# Altium PCB VlakecRemote.PcbDoc
Units mm, origin at the board's own origin, x right, y up, seen from the top; angles counter-clockwise.
Board outline 51.31 x 33.91 mm, 2 copper layers (Top Layer, Bottom Layer); 73 components, 50 nets, 159 pads, 66 vias.
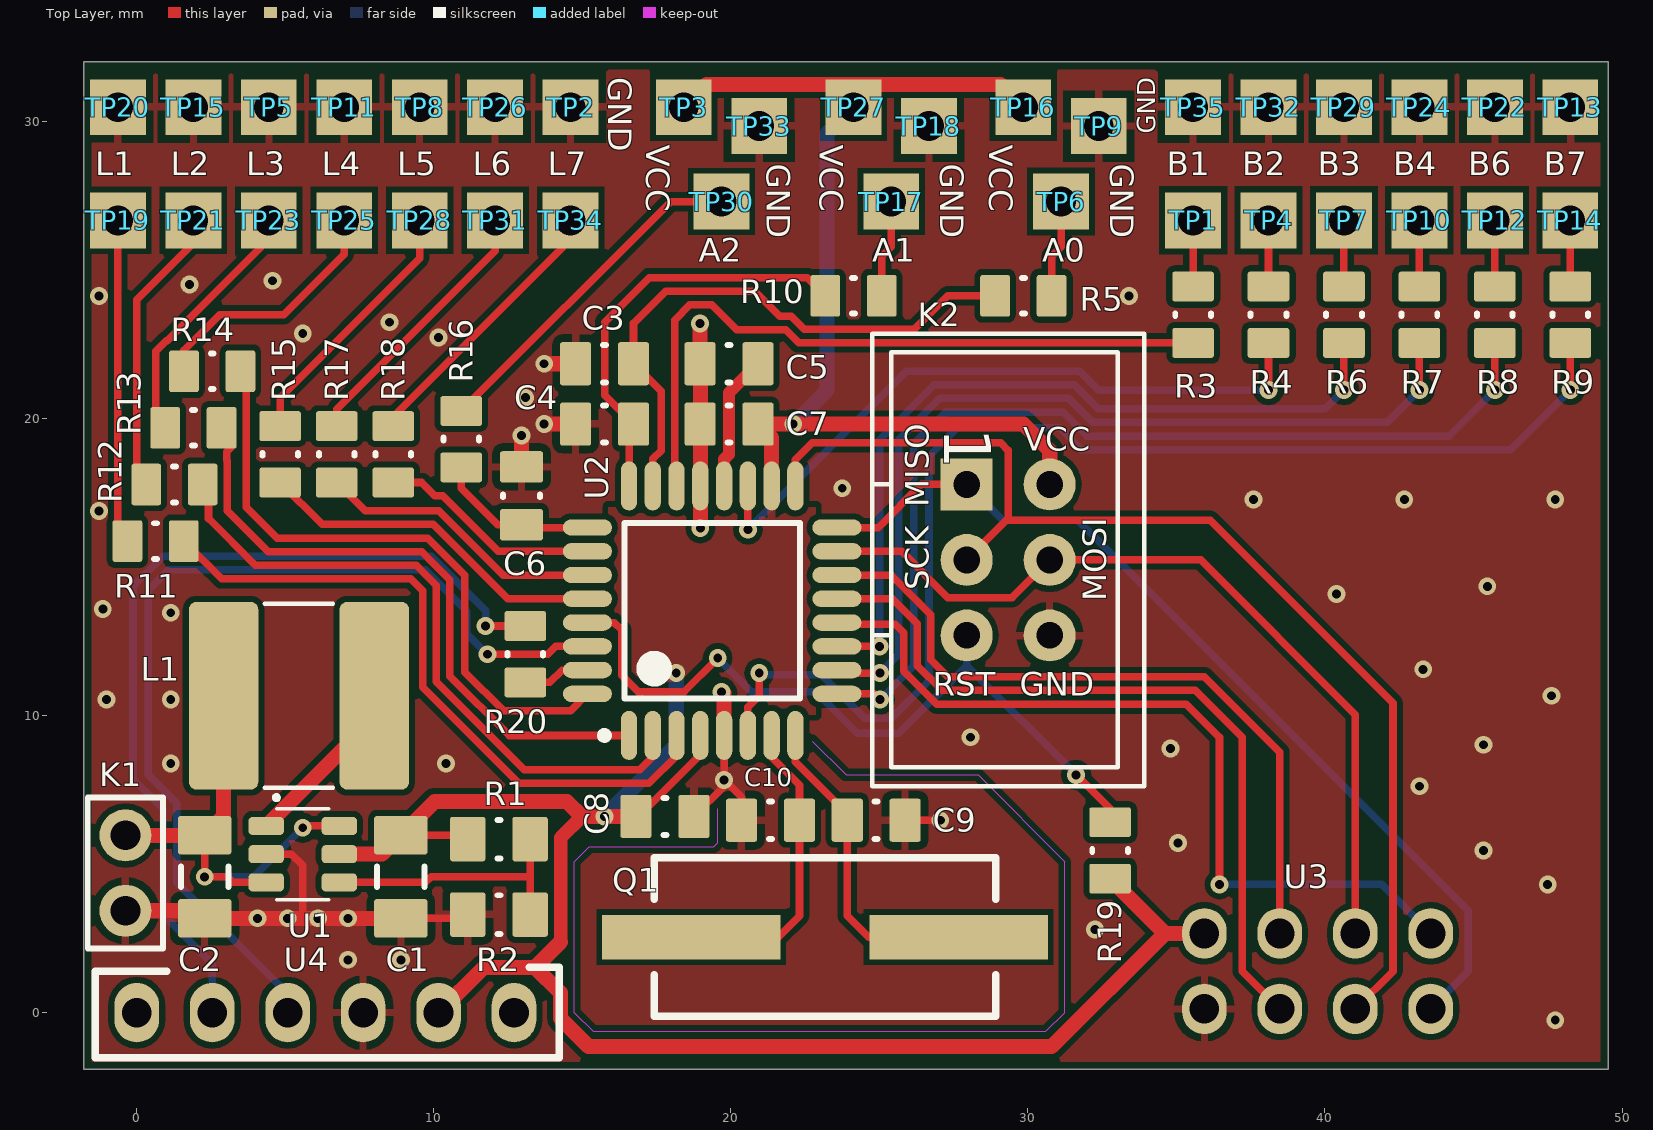
[diagram p0: Top Layer view]
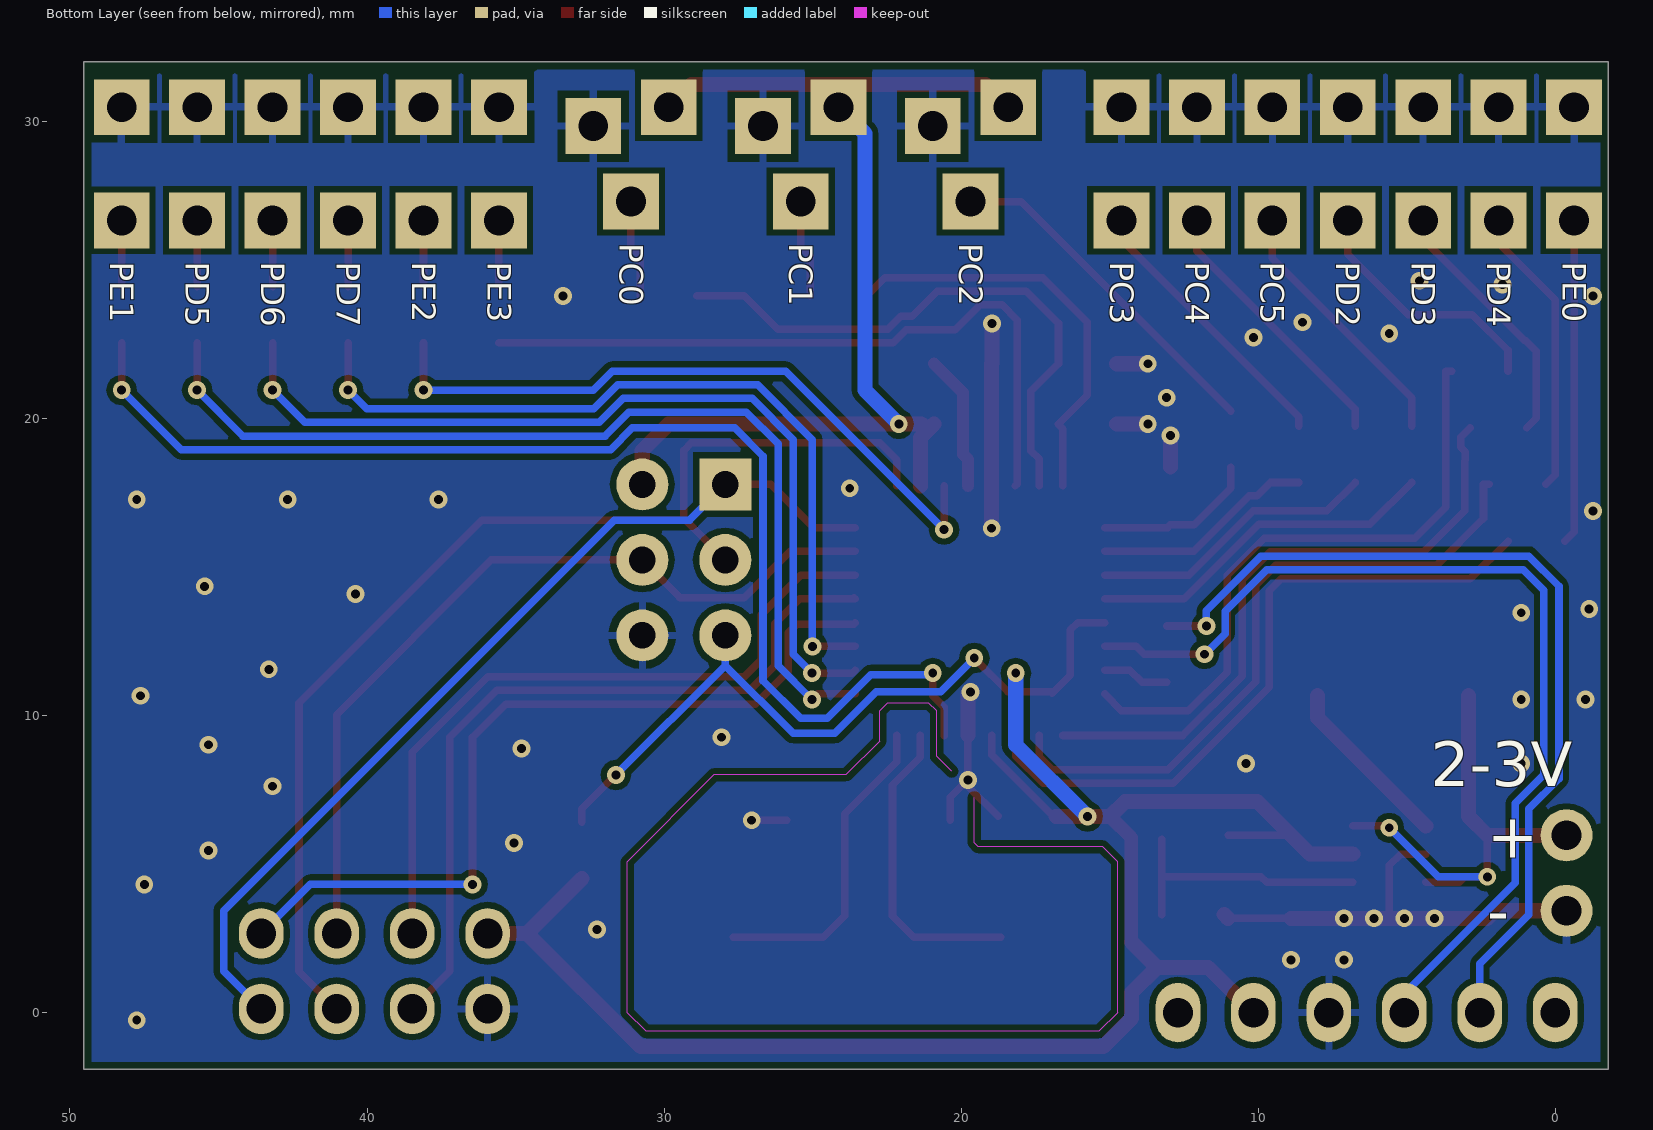
[diagram p1: Bottom Layer view, seen from below]

## Layer stack, top to bottom
Top Solder: solder mask 0.0102, Solder Resist, Dk 3.5
Top Layer: signal copper 0.0356
Dielectric 1: dielectric 0.32, FR-4, Dk 4.8
Bottom Layer: signal copper 0.0356
Bottom Solder: solder mask 0.0102, Solder Resist, Dk 3.5

## Board outline
-1.778,-1.905 -1.778,32.004 49.53,32.004 49.53,-1.905

## Design rules (kind name [scope] priority, off if disabled: settings)
BoardOutlineClearance [All] p1: gap=0.254 ignorepadtopadclearanceinfootprint=FALSE
Clearance [All] p1: gap=0.203 ignorepadtopadclearanceinfootprint=FALSE
HoleSize [All] p1: absolutevalues=TRUE maxlimit=25.4 minlimit=0.025 maxpercent=80.000 minpercent=20.000
HoleToHoleClearance [All] p1: gap=0.152 allowstackedmicrovias=TRUE
MinimumSolderMaskSliver [All] p1: minsoldermaskwidth=0.152
PolygonConnect [All] p1: thpad.connectstyle=Relief thpad.reliefconductorwidth=0.254 thpad.reliefentries=4 thpad.polygonreliefangle="90 Angle" thpad.airgapwidth=0.254 smdpad.connectstyle=Relief smdpad.reliefconductorwidth=0.254 smdpad.reliefentries=4 smdpad.polygonreliefangle="90 Angle" smdpad.airgapwidth=0.254 via.connectstyle=Direct via.reliefconductorwidth=0.254 via.reliefentries=4 via.polygonreliefangle="90 Angle" via.airgapwidth=0.254
RoutingVias [All] p1: holewidth=0.3 width=0.6 viastyle="Through Hole" minholewidth=0.3 minwidth=0.6 maxholewidth=0.711 maxwidth=1.27
SilkToSilkClearance [All] p1: silktosilkclearance=0.152
SilkToSolderMaskClearance [IsPad] p1: minsilkscreentomaskgap=0.152 clearancetoexposedcopper=TRUE
SolderMaskExpansion [All] p1: expansion=0.102
Width [All] p1: maxlimit=0.508 minlimit=0.203 preferedwidth=0.254
25 further rules are at their usual default settings.

## Components (designator, comment, footprint, x,y, rotation, side; value= is the part's Value field where it differs from the comment)
C1 "10u" C1206(3216)_N 8.89,4.572 r270 top
C2 "10u" C1206(3216)_N 2.286,4.572 r270 top
C3 "100n" C0805(2012)_N 15.748,21.844 r180 top
C4 "100n" C0805(2012)_N 15.748,19.812 r180 top
C5 "100n" C0805(2012)_N 19.939,21.844 r180 top
C6 "100n" C0805(2012)_N 12.954,17.399 r90 top
C7 "100n" C0805(2012)_N 19.939,19.812 r180 top
C8 "100n" C0805(2012)_N 17.78,6.604 r0 top
C9 "18p" C0805(2012)_N 24.892,6.477 r0 top
C10 "18p" C0805(2012)_N 21.336,6.477 r180 top
K1 "H1x2" H1x2 -0.381,5.969 r90 top
K2 "H2x3" H2X3_SPEEDY 27.94,17.78 r270 top
L1 "8.2uH" L2424_6060_M 5.461,10.668 r0 top
Q1 "8MHz" Crystal_HC49 27.668,2.54 r180 top
R1 "1M24" R0805(2012)_M 12.192,5.842 r0 top
R2 "200k" R0805(2012)_M 12.192,3.302 r180 top
R3 "330R" R0805(2012)_N 35.56,23.495 r90 top
R4 "330R" R0805(2012)_N 38.1,23.495 r90 top
R5 "330R" R0805(2012)_N 29.845,24.13 r0 top
R6 "330R" R0805(2012)_N 40.64,23.495 r90 top
R7 "330R" R0805(2012)_N 43.18,23.495 r90 top
R8 "330R" R0805(2012)_N 45.72,23.495 r90 top
R9 "330R" R0805(2012)_N 48.26,23.495 r90 top
R10 "330R" R0805(2012)_N 24.13,24.13 r0 top
R11 "330R" R0805(2012)_N 0.635,15.875 r180 top
R12 "330R" R0805(2012)_N 1.27,17.78 r180 top
R13 "330R" R0805(2012)_N 1.905,19.685 r180 top
R14 "330R" R0805(2012)_N 2.54,21.59 r180 top
R15 "330R" R0805(2012)_N 4.826,18.796 r90 top
R16 "330R" R0805(2012)_N 10.922,19.304 r90 top
R17 "330R" R0805(2012)_N 6.731,18.796 r90 top
R18 "330R" R0805(2012)_N 8.636,18.796 r90 top
R19 "10k" R0805(2012)_N 32.766,5.461 r270 top
R20 "330R" R0805(2012)_N 13.081,12.065 r90 top
TP1 "PAD" PAD_HOLE 35.56,26.67 r90 top
TP2 "PAD" PAD_HOLE 14.605,30.48 r90 top
TP3 "PAD" PAD_HOLE 18.415,30.48 r0 top
TP4 "PAD" PAD_HOLE 38.1,26.67 r90 top
TP5 "PAD" PAD_HOLE 4.445,30.48 r90 top
TP6 "PAD" PAD_HOLE 31.115,27.305 r0 top
TP7 "PAD" PAD_HOLE 40.64,26.67 r0 top
TP8 "PAD" PAD_HOLE 9.525,30.48 r0 top
TP9 "PAD" PAD_HOLE 32.385,29.845 r0 top
TP10 "PAD" PAD_HOLE 43.18,26.67 r0 top
TP11 "PAD" PAD_HOLE 6.985,30.48 r0 top
TP12 "PAD" PAD_HOLE 45.72,26.67 r90 top
TP13 "PAD" PAD_HOLE 48.26,30.48 r90 top
TP14 "PAD" PAD_HOLE 48.26,26.67 r90 top
TP15 "PAD" PAD_HOLE 1.905,30.48 r90 top
TP16 "PAD" PAD_HOLE 29.845,30.48 r90 top
TP17 "PAD" PAD_HOLE 25.4,27.305 r90 top
TP18 "PAD" PAD_HOLE 26.67,29.845 r90 top
TP19 "PAD" PAD_HOLE -0.635,26.67 r90 top
TP20 "PAD" PAD_HOLE -0.635,30.48 r90 top
TP21 "PAD" PAD_HOLE 1.905,26.67 r90 top
TP22 "PAD" PAD_HOLE 45.72,30.48 r90 top
TP23 "PAD" PAD_HOLE 4.445,26.67 r90 top
TP24 "PAD" PAD_HOLE 43.18,30.48 r90 top
TP25 "PAD" PAD_HOLE 6.985,26.67 r0 top
TP26 "PAD" PAD_HOLE 12.065,30.48 r0 top
TP27 "PAD" PAD_HOLE 24.13,30.48 r90 top
TP28 "PAD" PAD_HOLE 9.525,26.67 r90 top
TP29 "PAD" PAD_HOLE 40.64,30.48 r90 top
TP30 "PAD" PAD_HOLE 19.685,27.305 r90 top
TP31 "PAD" PAD_HOLE 12.065,26.67 r90 top
TP32 "PAD" PAD_HOLE 38.1,30.48 r90 top
TP33 "PAD" PAD_HOLE 20.955,29.845 r90 top
TP34 "PAD" PAD_HOLE 14.605,26.67 r90 top
TP35 "PAD" PAD_HOLE 35.56,30.48 r90 top
U1 "TPS61071" SOT23-6_N 5.588,5.334 r270 top
U2 "ATmega328PB-AU" 32A_N 19.372,13.53 r90 top
U3 "NRF24L01+" NRF24L01+tht_module 39.751,10.287 r90 top locked
U4 "HC-05" HC05-horizontal-direct 12.7,0 r270 top

## Footprints (in the part's own frame and the unit in brackets; to place one, negate y for a bottom-side part, rotate by r counter-clockwise, add the part's x,y. Pads: shape width x height; smd on the part's side, far side on the other; paste and mask are expansions set on the pad)
32A_N [mm] "Thin QFP, 32-Leads, Body 7x7mm, Pitch 0.8mm, IPC Medium Density"
  oval 1.65x0.55 smd: 1(-4.2,2.8) 2(-4.2,2) 3(-4.2,1.2) 4(-4.2,0.4) 5(-4.2,-0.4) 6(-4.2,-1.2) 7(-4.2,-2) 8(-4.2,-2.8) 17(4.2,-2.8) 18(4.2,-2) 19(4.2,-1.2) 20(4.2,-0.4) 21(4.2,0.4) 22(4.2,1.2) 23(4.2,2) 24(4.2,2.8)
  oval 0.55x1.65 smd: 9(-2.8,-4.2) 10(-2,-4.2) 11(-1.2,-4.2) 12(-0.4,-4.2) 13(0.4,-4.2) 14(1.2,-4.2) 15(2,-4.2) 16(2.8,-4.2) 25(2.8,4.2) 26(2,4.2) 27(1.2,4.2) 28(0.4,4.2) 29(-0.4,4.2) 30(-1.2,4.2) 31(-2,4.2) 32(-2.8,4.2)
  silkscreen extent -4.32,-2.95 2.95,3.75, body extent -3.5,-3.5 3.5,3.5, height 1.2
C0805(2012)_N [mm] "Chip Capacitor, 2-Leads, Body 2.05x1.25mm, IPC Medium Density"
  rrect15% 1.05x1.45 smd: 1(-0.975,0) 2(0.975,0)
  silkscreen extent -0.05,-0.63 0.05,0.63, body extent -1.1,-0.7 1.1,0.7, height 1.4
C1206(3216)_N [mm] "Chip Capacitor, 2-Leads, Body 3.20x1.60mm, IPC Medium Density"
  rrect15% 1.3x1.8 smd: 1(-1.4,0) 2(1.4,0)
  silkscreen extent -0.35,-0.8 0.35,0.8, body extent -1.7,-0.9 1.7,0.9, height 1.8
Crystal_HC49 [mm] "Crystall SMD short HC49"
  rect 6x1.5 smd: 1(0,0) 2(8.999,0)
  silkscreen extent -1.25,-2.67 10.25,2.67, body extent -2.13,-2.41 11.27,2.49, height 5.08
H1x2 [mm]
  round 1.75 hole 1: 1(0,0) 2(-2.54,0)
  silkscreen extent -3.81,-1.27 1.27,1.27, body extent -3.81,-1.27 1.27,1.27, height 8.4
H2X3_SPEEDY [mm]
  rect 1.75x1.75 hole 0.9: 1(0,0)
  round 1.75 hole 0.9: 2(0,2.794) 3(2.54,0) 4(2.54,2.794) 5(5.08,0) 6(5.08,2.794)
  silkscreen extent -5.08,-3.18 10.16,5.97, body extent -5.08,-3.18 10.16,6.03, height 9.45
HC05-horizontal-direct [mm]
  oval 2x1.5 hole 1: 1(0,-12.7) 2(0,-10.16) 3(0,-7.62) 4(0,-5.08) 5(0,-2.54) 6(0,0)
  body extent -35.75,-14.3 6.85,1.8, height 16.9
L2424_6060_M [mm] "Inductor, Chip; 6.00 mm L X 6.00 mm W X 2.80 mm H body"
  rrect21% 2.34x6.32 smd: 1(-2.54,0) 2(2.54,0)
  silkscreen extent -1.14,-3.1 1.14,3.1, body extent -3,-3 3,3, height 4.51
NRF24L01+tht_module [mm]
  oval 1.7x1.5 hole 1: 1(-10.16,3.81) 2(-7.62,3.81) 3(-10.16,1.27) 4(-7.62,1.27) 5(-10.16,-1.27) 6(-7.62,-1.27) 7(-10.16,-3.81) 8(-7.62,-3.81)
  body extent -11.75,-9.62 17.25,5.39, height 14.21
PAD_HOLE [mil]
  rect 74x74 hole 39.4: 1(0,0)
R0805(2012)_M [mm] "Chip Resistor, 2-Leads, Body 2.05x1.25mm, IPC Low Density"
  rrect15% 1.2x1.5 smd: 1(-1.05,0) 2(1.05,0)
  silkscreen extent -0.05,-0.65 0.05,0.65, body extent -1.1,-0.7 1.1,0.7, height 0.8
R0805(2012)_N [mm] "Chip Resistor, 2-Leads, Body 2.05x1.25mm, IPC Medium Density"
  rrect15% 1x1.4 smd: 1(-0.95,0) 2(0.95,0)
  silkscreen extent -0.05,-0.6 0.05,0.6, body extent -1.1,-0.7 1.1,0.7, height 0.8
SOT23-6_N [mm] "Small Outline Transistor (SOT23), 0.95 mm pitch; 6 pin, 2.90 mm L X 1.60 mm W X 1.10 mm H body"
  rrect49% 0.61x1.2 smd: 1(-0.95,-1.23) 2(0,-1.23) 3(0.95,-1.23) 4(0.95,1.23) 5(0,1.23) 6(-0.95,1.23)
  silkscreen extent -1.98,-0.96 1.53,0.88, body extent -1.45,-1.4 1.45,1.4, height 1.1

## Part data
C1 C2 C3 C4 C5 C6 C7 C8 C9 C10: library part C, "Capacitor"
K1: "Header 1x2 (male)"
K2: "Header 2x3 (male)"
L1: library part L, "L", Supplier Part Number 1=2146232, Supplier 1=Farnell
Q1: library part Crystal, "Crystal"
R1 R2 R3 R4 R5 R6 R7 R8 R9 R10 R11 R12 R13 R14 R15 R16 R17 R18 R19 R20: library part R, "R"
U1: "Sync. Boost converter"
U2: "8-bit AVR Microcontroller, 32KB Flash, 1KB EEPROM, 2KB SRAM, 32-pin TQFP, Industrial Grade (-40°C to 85°C)", Code_JEDEC=MS-026-ABA, ComponentLink1Description="Manufacturer URL", ComponentLink1URL=http://www.atmel.com/, ComponentLink2Description="ATmega328PB Datasheet", ComponentLink2URL=http://www.atmel.com/Images/Atmel-42397-8-bit-AVR-Microcontroller-ATmega328PB_Datasheet.pdf, ComponentLink3Description="ATmega328P Summary", ComponentLink3URL=http://www.atmel.com/Images/Atmel-42397-8-bit-AVR-Microcontroller-ATmega328PB_Summary.pdf, DatasheetVersion="revC, Oct-2015", PackageDescription="32-Lead, 7x7x1.0 mm Body, 0.8mm Lead Pitch, Thin Profile Plastic Quad Flat Package (TQFP)", PackageReference=32A

## Via types
v1: diameter 0.6, hole 0.3, Top Layer to Bottom Layer, tented both sides, 66 vias

## Nets (pads, with @x,y where several pads share a name; then routed paths per layer and width w, separated by ;. In a path a pad name is that pad's centre, name@x,y a point inside that pad or via, vN(x,y) a via of type N, cw(c..) or ccw(c..) an arc to the next point about the centre after c; other vN are vias at no path point)
ADC0: C3.1 R5.1 U2.23 | length 19.6
  Top Layer w0.254: U2.23 17.372,18.643 17.652,18.923 17.652,20.915 C3.1 16.723,23.2 17.81,24.287 20.798,24.287 21.641,23.444 22.033,23.444 22.475,23.002 26.177,23.002 27.305,24.13 R5.1
ADC1: C4.1 R10.1 U2.24 | length 14.3
  Top Layer w0.254: U2.24 16.572,19.661 C4.1 15.748,20.787 15.748,23.241 17.252,24.745 22.565,24.745 R10.1
ADC2: C6.1 R16.1 U2.25 | length 5.5
  Top Layer w0.254: R16.1 10.922,17.653 12.151,16.424 C6.1 13.048,16.33 U2.25
BT_RX: R20.1 U2.31 | length 2.3
  Top Layer w0.254: R20.1 13.909,11.115 14.324,11.53 U2.31
BT_TX: U2.30 U4.3 | length 33
  Top Layer w0.254: v1(11.811,12.065) 13.843,12.065 14.108,12.33 U2.30
  Bottom Layer w0.254: U4.3 5.08,0.635 1.346,4.369 1.346,7.047 0.381,8.013 0.381,14.212 1.078,14.91 9.717,14.91 11.115,13.512 11.115,12.754 11.804,12.065 v1(11.811,12.065)
CE: U2.13 U3.3 | length 26.1
  Top Layer w0.254: U2.13@23.612,13.97 U2.13 25.44,13.93 26.278,13.092 26.278,11.684 27.116,10.846 35.636,10.846 37.211,9.271 37.211,1.397 U3.3
GND: C1.2 C2.2 C3.2 C4.2 C5.2 C6.2 C7.2 C8.2 C9.2 C10.2 K1.2 K2.6 R2.2 TP2.1 TP5.1 TP8.1 TP9.1 TP11.1 TP13.1 TP15.1 TP18.1 TP20.1 TP22.1 TP24.1 TP26.1 TP29.1 TP32.1 TP33.1 TP35.1 U1.2 U2.5 U2.21 U3.1 U4.4 | length 32.4
  Top Layer w0.254: U1.2 5.207,5.334 5.587,4.954 5.587,3.175 ; C1.2 R2.2@11.012,3.172 ; C8.2 19.772,7.621 v1(19.772,7.834) ; v1(19.685,10.795) 19.732,10.795 v1@19.772,10.755 ; U2.5 v1(19.772,7.834) ; C10.2 20.361,7.245 v1(19.772,7.834) ; C9.2 v1(27.051,6.477)
  Top Layer w0.508: K1.2 2.029,3.429 C2.2 ; C2.2@2.286,3.175 5.587,3.175 8.887,3.175 C1.2 ; R2.2@11.012,3.172 R2.2 ; C6.2 v1(12.954,19.431) ; v1(13.716,19.812) C4.2 ; v1(13.716,21.844) C3.2 ; v1(18.964,23.2) C5.2 18.972,21.836 U2.21 v1(18.972,16.305) ; U2.5 v1@19.772,10.755
  other v1: 47.752,-0.254 7.112,1.778 8.89,1.778 32.258,2.794 4.064,3.175 5.08,3.175 6.096,3.175 7.112,3.175 47.498,4.318 45.339,5.461 35.052,5.715 43.18,7.62 1.143,8.382 10.414,8.382 34.798,8.89 45.339,9.017 28.067,9.271 -1.016,10.541 1.143,10.541 47.625,10.668 43.307,11.557 1.143,13.462 -1.143,13.589 40.386,14.097 45.466,14.351 -1.27,16.891 37.592,17.272 42.672,17.272 47.752,17.272 23.749,17.653 13.081,20.701 10.16,22.733 5.588,22.86 8.509,23.241 -1.27,24.13 33.401,24.13 1.778,24.511 4.572,24.638
IRQ: U2.12 U3.8 | length 28
  Top Layer w0.254: U2.12 23.621,13.081 25.527,13.081 25.82,12.788 25.82,11.494 26.926,10.389 35.331,10.389 36.449,9.271 v1(36.449,4.318)
  Bottom Layer w0.254: v1(36.449,4.318) 41.91,4.318 U3.8
MISO: K2.1 U2.16 U3.7 | length 31.6
  Top Layer w0.254: U2.16 24.966,16.33 26.416,17.78 K2.1
  Bottom Layer w0.254: K2.1 29.145,16.575 31.685,16.575 44.831,3.429 44.831,1.397 U3.7
MOSI: K2.4 U2.15 U3.6 | length 28.1
  Top Layer w0.254: U2.15 25.745,15.53 27.305,13.97 29.464,13.97 K2.4 35.814,15.24 41.021,10.033 U3.6
nCS: U2.14 U3.4 | length 24.4
  Top Layer w0.254: U2.14 25.402,14.73 26.735,13.397 26.735,11.873 27.305,11.303 35.941,11.303 38.481,8.763 U3.4
NetC5_1: C5.1 U2.20 | length 4.6
  Top Layer w0.406: U2.20 19.772,18.629 19.939,18.796 19.939,20.869 C5.1
NetC9_1: C9.1 Q1.1 U2.8 | length 10.8
  Top Layer w0.254: U2.8 22.172,8.447 23.917,6.702 C9.1 23.917,3.261 24.638,2.54 Q1.1
NetC10_1: C10.1 Q1.2 U2.7 | length 10.4
  Top Layer w0.254: Q1.2 21.59,2.54 22.311,3.261 C10.1 22.311,7.661 21.372,8.6 U2.7
NetL1_2: L1.2 U1.1 | length 5.9
  Top Layer w0.508: U1.1 8.001,9.927 L1.2
NetR1_2: R1.2 R2.1 U1.4 | length 9
  Top Layer w0.254: U1.4 9.718,4.384 9.906,4.572 13.208,4.572 ; R2.1 R1.2
NetR3_2: R3.2 TP1.1 | length 2.2
  Top Layer w0.254: R3.2 TP1.1
NetR4_2: R4.2 TP4.1 | length 2.2
  Top Layer w0.254: R4.2 TP4.1
NetR5_2: R5.2 TP6.1 | length 3.3
  Top Layer w0.254: R5.2 30.795,25.461 31.115,25.781 TP6.1
NetR6_2: R6.2 TP7.1 | length 2.2
  Top Layer w0.254: R6.2 TP7.1
NetR7_2: R7.2 TP10.1 | length 2.2
  Top Layer w0.254: R7.2 TP10.1
NetR8_2: R8.2 TP12.1 | length 2.2
  Top Layer w0.254: R8.2 TP12.1
NetR9_2: R9.2 TP14.1 | length 2.2
  Top Layer w0.254: R9.2 TP14.1
NetR10_2: R10.2 TP17.1 | length 3.3
  Top Layer w0.254: R10.2 25.08,25.461 25.4,25.781 TP17.1
NetR11_2: R11.2 TP19.1 | length 10.9
  Top Layer w0.254: TP19.1 -0.635,16.195 R11.2
NetR12_2: R12.2 TP21.1 | length 9.8
  Top Layer w0.254: R12.2 0,18.1 0,24.003 1.905,25.908 TP21.1
NetR13_2: R13.2 TP23.1 | length 8.7
  Top Layer w0.254: R13.2 0.635,20.005 0.635,22.258 0.997,22.62 1.03,22.62 4.445,26.035 TP23.1
NetR14_2: R14.2 TP25.1 | length 8.6
  Top Layer w0.254: R14.2 1.59,22.291 2.794,23.495 4.953,23.495 6.985,25.527 TP25.1
NetR15_2: R15.2 TP28.1 | length 8.9
  Top Layer w0.254: R15.2 4.826,20.701 9.525,25.4 TP28.1
NetR16_2: R16.2 TP30.1 | length 11.7
  Top Layer w0.254: R16.2 17.973,27.305 TP30.1
NetR17_2: R17.2 TP31.1 | length 9.1
  Top Layer w0.254: R17.2 6.731,20.32 12.065,25.654 TP31.1
NetR18_2: R18.2 TP34.1 | length 9.4
  Top Layer w0.254: R18.2 8.636,20.066 14.605,26.035 TP34.1
NetR20_2: R20.2 U4.2 | length 30.4
  Top Layer w0.254: v1(11.745,13.015) R20.2
  Bottom Layer w0.254: U4.2 2.54,1.651 0.889,3.302 0.889,6.858 -0.127,7.874 -0.127,14.351 0.889,15.367 9.906,15.367 11.745,13.528 v1(11.745,13.015)
PC3: R18.1 U2.26 | length 7.5
  Top Layer w0.254: R18.1 9.586,17.846 10.033,17.399 10.308,17.399 12.177,15.53 U2.26
PC4: R17.1 U2.27 | length 9.7
  Top Layer w0.254: R17.1 7.686,16.891 10.17,16.891 12.331,14.73 U2.27
PC5: R15.1 U2.28 | length 12
  Top Layer w0.254: R15.1 6.238,16.434 9.98,16.434 12.484,13.93 U2.28
PD2: R14.1 U2.32 | length 21.2
  Top Layer w0.254: R14.1 3.685,21.59 3.685,17.016 4.724,15.977 9.791,15.977 11.049,14.718 11.049,11.465 12.354,10.16 14.602,10.16 U2.32
PD3: R13.1 U2.1 | length 21.6
  Top Layer w0.254: R13.1 3.175,19.365 3.175,19.029 3.033,18.886 3.033,18.59 3.05,18.573 3.05,16.889 4.42,15.519 9.601,15.519 10.541,14.58 10.541,14.201 10.543,14.2 10.543,11.325 12.537,9.33 U2.1
PD4: R12.1 U2.2 | length 22.6
  Top Layer w0.254: R12.1 2.415,17.78 2.415,16.635 3.988,15.062 9.412,15.062 10.084,14.39 10.084,14.012 10.085,14.01 10.085,11.135 13.046,8.175 16.938,8.175 17.372,8.609 U2.2
PD5: R8.1 U2.9 | length 33.2
  Top Layer w0.254: U2.9 24.83,10.73 v1(25.019,10.541) ; v1(45.72,20.955) R8.1
  Bottom Layer w0.254: v1(25.019,10.541) 25.021,10.541 26.162,11.682 26.162,19.154 27.227,20.218 31.182,20.218 31.99,19.41 44.175,19.41 v1(45.72,20.955)
PD6: R7.1 U2.10 | length 30.1
  Top Layer w0.254: U2.10 23.672,11.43 v1(25.019,11.43) ; v1(43.18,20.955) R7.1
  Bottom Layer w0.254: v1(25.019,11.43) 25.654,12.065 25.654,19.292 27.037,20.676 31.371,20.676 32.179,19.868 42.093,19.868 v1(43.18,20.955)
PD7: R6.1 U2.11 | length 27
  Top Layer w0.254: U2.11 v1(25.008,12.33) ; v1(40.64,20.955) R6.1
  Bottom Layer w0.254: v1(25.008,12.33) 25.008,19.293 26.848,21.133 31.561,21.133 32.369,20.325 40.01,20.325 v1(40.64,20.955)
PE0: R11.1 U2.3 | length 22.9
  Top Layer w0.254: R11.1 2.855,14.605 9.223,14.605 9.627,14.201 9.627,10.947 12.856,7.718 17.243,7.718 18.161,8.636 18.161,9.319 U2.3
PE1: R9.1 U2.6 | length 41.4
  Top Layer w0.254: U2.6 20.572,10.285 20.955,10.668 v1(20.955,11.43) ; v1(48.26,20.955) R9.1
  Bottom Layer w0.254: v1(20.955,11.43) 20.955,11.379 23.038,11.379 24.511,9.906 25.4,9.906 26.67,11.176 26.67,18.727 27.628,19.685 31.069,19.685 31.8,18.953 46.258,18.953 v1(48.26,20.955)
PE2: R4.1 U2.19 | length 23.1
  Top Layer w0.254: v1(20.572,16.258) U2.19 ; v1(38.1,20.955) R4.1
  Bottom Layer w0.254: v1(20.572,16.258) 25.904,21.59 31.75,21.59 32.385,20.955 v1(38.1,20.955)
PE3: R3.1 U2.22 | length 23.8
  Top Layer w0.254: U2.22 18.109,17.793 18.109,23.316 18.623,23.83 19.35,23.83 20.193,22.987 21.844,22.987 22.286,22.545 R3.1
RST: K2.5 R19.1 U2.29 | length 25.4
  Top Layer w0.254: U2.29 16.08,13.13 16.327,12.883 16.327,11.359 16.929,10.757 16.972,10.8 18.422,10.8 v1(19.558,11.936) ; v1(31.623,8.001) 32.766,6.858 R19.1
  Bottom Layer w0.254: v1(19.558,11.936) 20.694,10.8 22.855,10.8 24.257,9.398 25.654,9.398 27.94,11.684 ; K2.5 27.94,11.684 ; v1(31.623,8.001) 27.94,11.684
SCK: K2.3 U2.17 U3.5 | length 39
  Top Layer w0.254: U2.17 22.172,18.616 22.733,19.177 29.083,19.177 29.337,18.923 29.337,16.637 ; K2.3 29.337,16.637 ; U3.5 42.291,1.397 42.291,10.414 36.13,16.575 29.337,16.575 29.337,16.637
VBAT: C2.1 K1.1 L1.1 U1.3 U1.6 | length 16.4
  Top Layer w0.254: C2.1@2.283,5.969 C2.1 v1(2.286,4.572) 3.048,4.572 3.236,4.384 U1.3 ; v1(5.588,6.223) 5.649,6.284 U1.6
  Top Layer w0.508: K1.1 C2.1@2.283,5.969 ; C2.1 2.921,6.607 L1.1
  Bottom Layer w0.254: v1(2.286,4.572) 3.937,4.572 v1(5.588,6.223)
VCC: C1.1 C7.1 C8.1 K2.2 R1.1 R19.2 TP3.1 TP16.1 TP27.1 U1.5 U2.4 U2.18 U3.2 U4.5 | length 98.3
  Top Layer w0.254: C1.1 R1.1@11.012,5.972 ; C8.1 16.891,6.604 18.972,8.685 U2.4
  Top Layer w0.457: 14.262,2.378 14.274,2.39 14.274,5.892 14.986,6.604
  Top Layer w0.508: U1.5 8.252,5.334 C1.1 10.03,7.112 14.478,7.112 14.986,6.604 v1(15.748,6.604) C8.1 ; U4.5 11.684,1.524 13.408,1.524 ; 14.262,2.378 13.408,1.524 ; TP3.1 19.177,31.242 TP27.1@24.13,31.242 ; C7.1 C7.1@21.125,19.601 ; U2.18 21.372,19.354 C7.1@21.125,19.601 ; TP27.1 TP27.1@24.13,31.242 ; TP16.1 29.083,31.242 TP27.1@24.13,31.242 ; K2.2 30.734,18.923 29.845,19.812 v1(22.098,19.812) 21.336,19.812 C7.1@21.125,19.601 ; R19.2 34.61,2.667 ; U3.2 34.61,2.667 ; 13.408,1.524 14.262,0.67 14.262,-0.195 15.21,-1.143 30.8,-1.143 34.61,2.667
  Bottom Layer w0.508: v1(15.748,6.604) 18.161,9.017 v1(18.161,11.43) ; v1(22.098,19.812) 23.241,20.955 23.241,29.591 TP27.1
pads on no net: U4.1 U4.6

## Polygon pours and split planes (outlines as drawn)
GND on Top Layer "TOP GND" (solid, remove dead copper, pour order 2): -1.778,-1.905 -1.778,32.004 49.53,32.004 49.53,-1.905
VCC on Top Layer "TOP VCC" (solid, pour order 0): 15.875,17.018 22.86,17.018 22.86,10.033 15.875,10.033
GND on Bottom Layer "BOT GND" (solid, remove dead copper, pour order 4): -1.778,-1.905 -1.778,32.004 49.53,32.004 49.53,-1.905

## Keep-outs
Bottom Layer:
  lines w0.025: 19.558,6.858 19.558,7.239 ; 20.32,8.128 20.828,8.636 20.828,10.16 21.082,10.414 22.479,10.414 22.733,10.16 22.733,9.144
Keep-Out Layer:
  lines w0.025: 19.558,6.858 19.558,5.715 19.431,5.588 15.24,5.588 14.732,5.08 14.732,0 15.367,-0.635 30.607,-0.635 31.242,0 31.242,5.08 28.321,8.001 23.876,8.001 22.733,9.144

## Silkscreen, mask and mechanical layers (free items; w line width, h text height)
Top Overlay:
  lines w0.254: 1.016,1.397 -1.397,1.397 -1.397,-1.524 -1.016,-1.524 14.224,-1.524 14.224,1.524 13.208,1.524
  text "GND" at 15.875,31.496 h0.8 r270
  text "GND" at 34.29,29.591 h0.6 r90
  text "VCC" at 17.145,29.21 h0.8 r270
  text "VCC" at 22.987,29.21 h0.8 r270
  text "VCC" at 28.702,29.21 h0.8 r270
  text "GND" at 21.209,28.575 h0.8 r270
  text "GND" at 27.051,28.575 h0.8 r270
  text "GND" at 32.766,28.575 h0.8 r270
  text "L1" at -1.397,28.194 h0.8
  text "L2" at 1.143,28.194 h0.8
  text "L3" at 3.683,28.194 h0.8
  text "L4" at 6.223,28.194 h0.8
  text "L5" at 8.763,28.194 h0.8
  text "L6" at 11.303,28.194 h0.8
  text "L7" at 13.843,28.194 h0.8
  text "B1" at 34.671,28.194 h0.8
  text "B2" at 37.211,28.194 h0.8
  text "B3" at 39.751,28.194 h0.8
  text "B4" at 42.291,28.194 h0.8
  text "B6" at 44.831,28.194 h0.8
  text "B7" at 47.371,28.194 h0.8
  text "A2" at 18.923,25.273 h0.8
  text "A1" at 24.765,25.273 h0.8
  text "A0" at 30.48,25.273 h0.8
  text "VCC" at 29.845,18.923 h0.8
  text "MISO" at 26.67,17.018 h0.8 r90
  text "SCK" at 26.67,14.224 h0.8 r90
  text "MOSI" at 32.639,13.843 h0.8 r90
  text "RST" at 26.797,10.668 h0.8
  text "GND" at 29.718,10.668 h0.8
Bottom Overlay:
  text "PC2" at 20.066,25.908 h0.8 r90
  text "PC1" at 25.781,25.908 h0.8 r90
  text "PC0" at 31.496,25.908 h0.8 r90
  text "PE0" at -0.254,25.273 h0.8 r90
  text "PD4" at 2.286,25.273 h0.8 r90
  text "PD3" at 4.826,25.273 h0.8 r90
  text "PD2" at 7.366,25.273 h0.8 r90
  text "PC5" at 9.906,25.273 h0.8 r90
  text "PC4" at 12.446,25.273 h0.8 r90
  text "PC3" at 14.986,25.273 h0.8 r90
  text "PE3" at 35.941,25.273 h0.8 r90
  text "PE2" at 38.481,25.273 h0.8 r90
  text "PD7" at 41.021,25.273 h0.8 r90
  text "PD6" at 43.561,25.273 h0.8 r90
  text "PD5" at 46.101,25.273 h0.8 r90
  text "PE1" at 48.641,25.273 h0.8 r90
  text "2-3V" at 4.191,7.62 h1.5
  text "+" at 2.286,5.207 h1.5
  text "-" at 2.286,2.667 h1.5
Board Outline:
  the board outline again, w0.254

## Text inside footprints (layer, text, board x,y; h text height)
K2: Top Overlay "1" at 27.178,19.685 h1.59 r270